# Altium PCB PCB1.PcbDoc
Units mm, origin at the board's own origin, x right, y up, seen from the top; angles counter-clockwise.
Board outline 50 x 50.13 mm, 2 copper layers (Top Layer, Bottom Layer); 11 components, 9 nets, 27 pads, 0 vias.
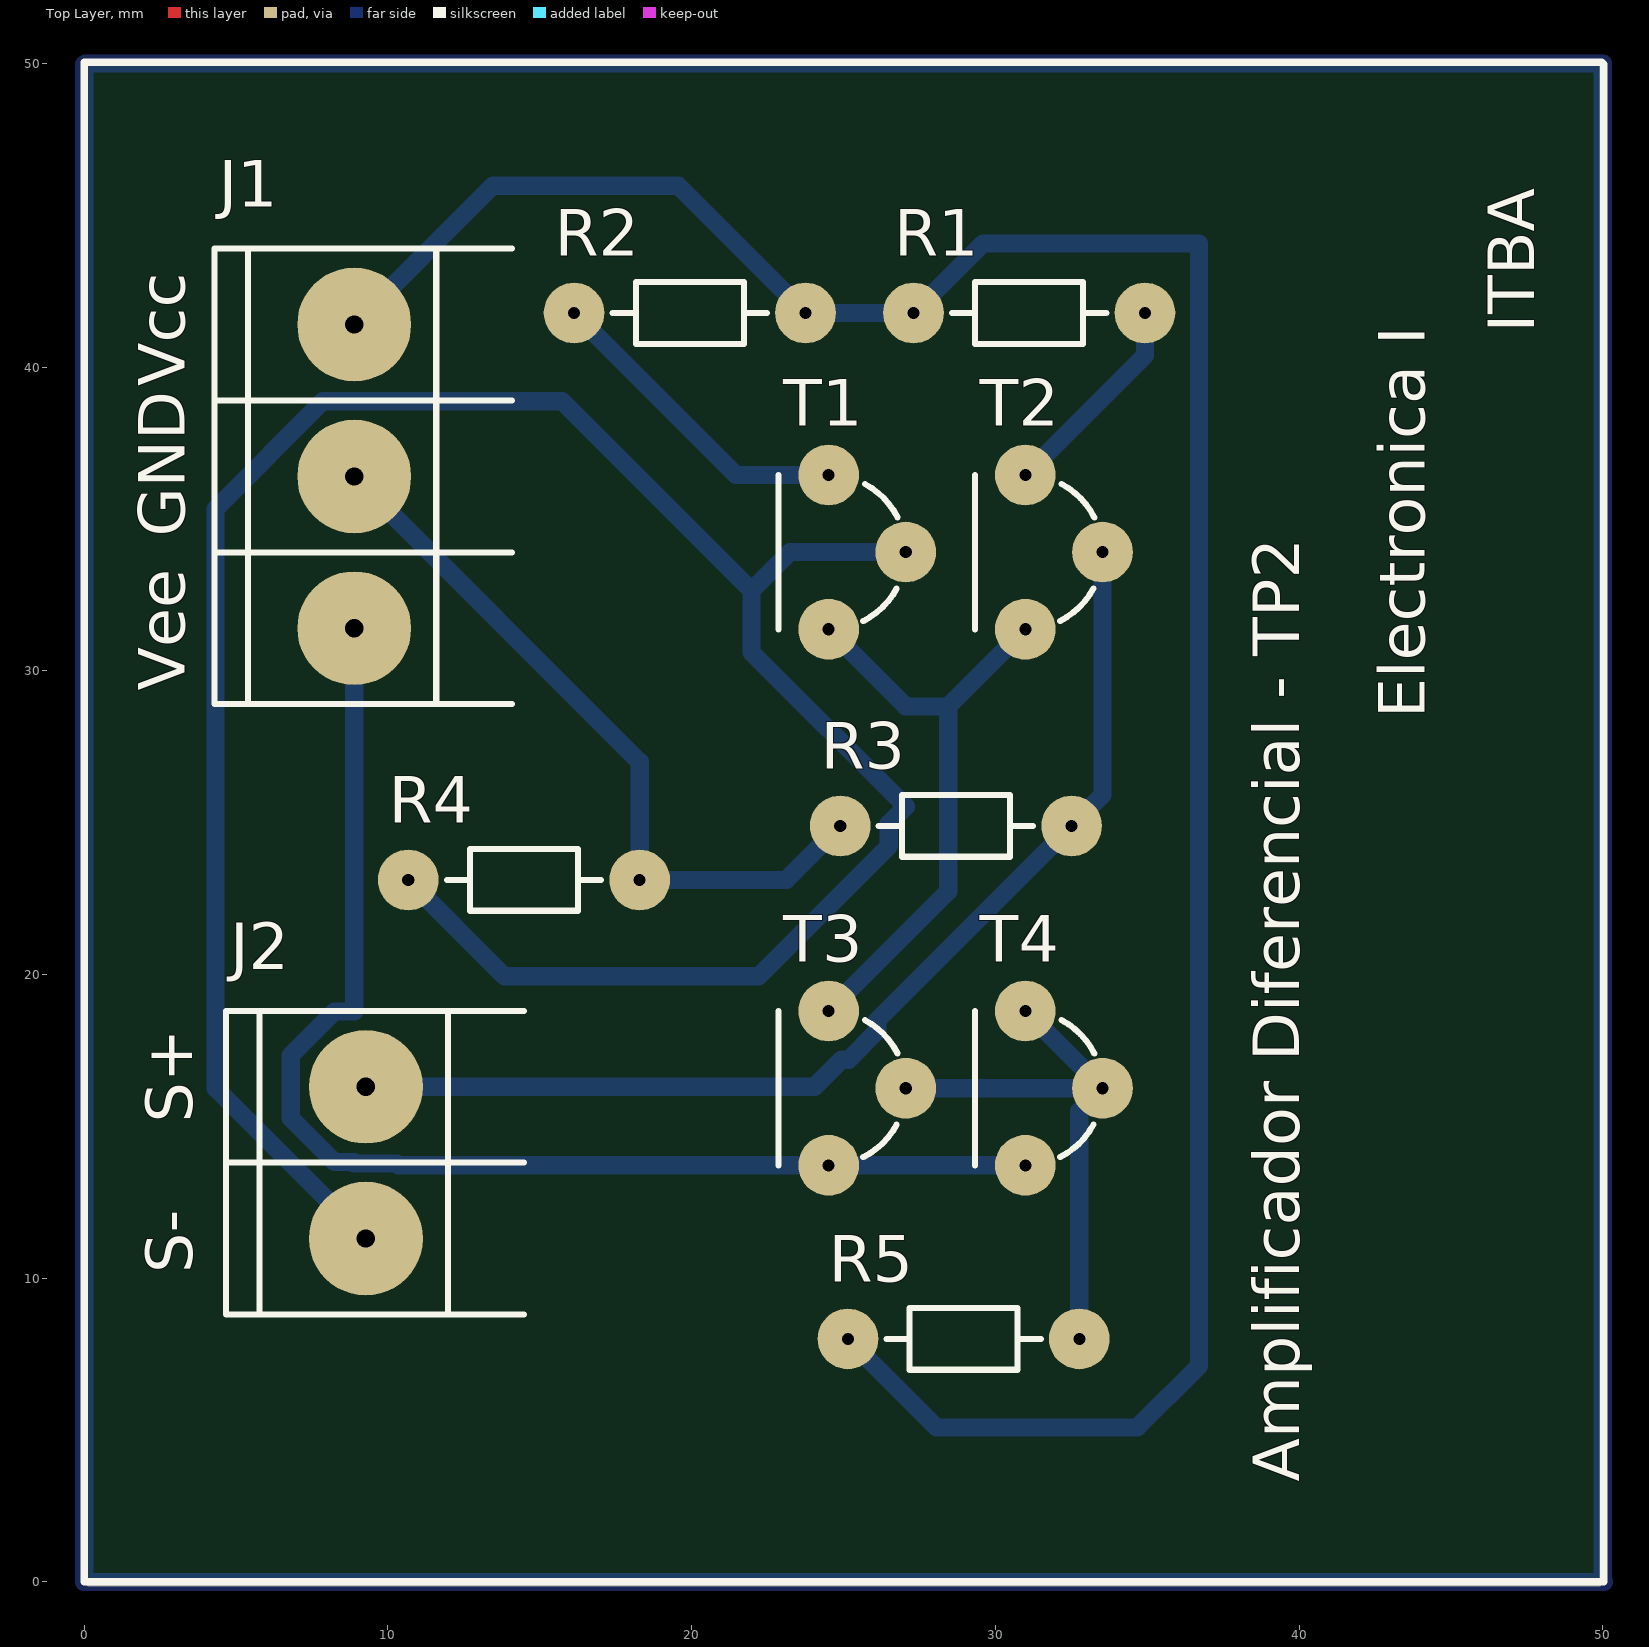
[diagram p0: Top Layer view]
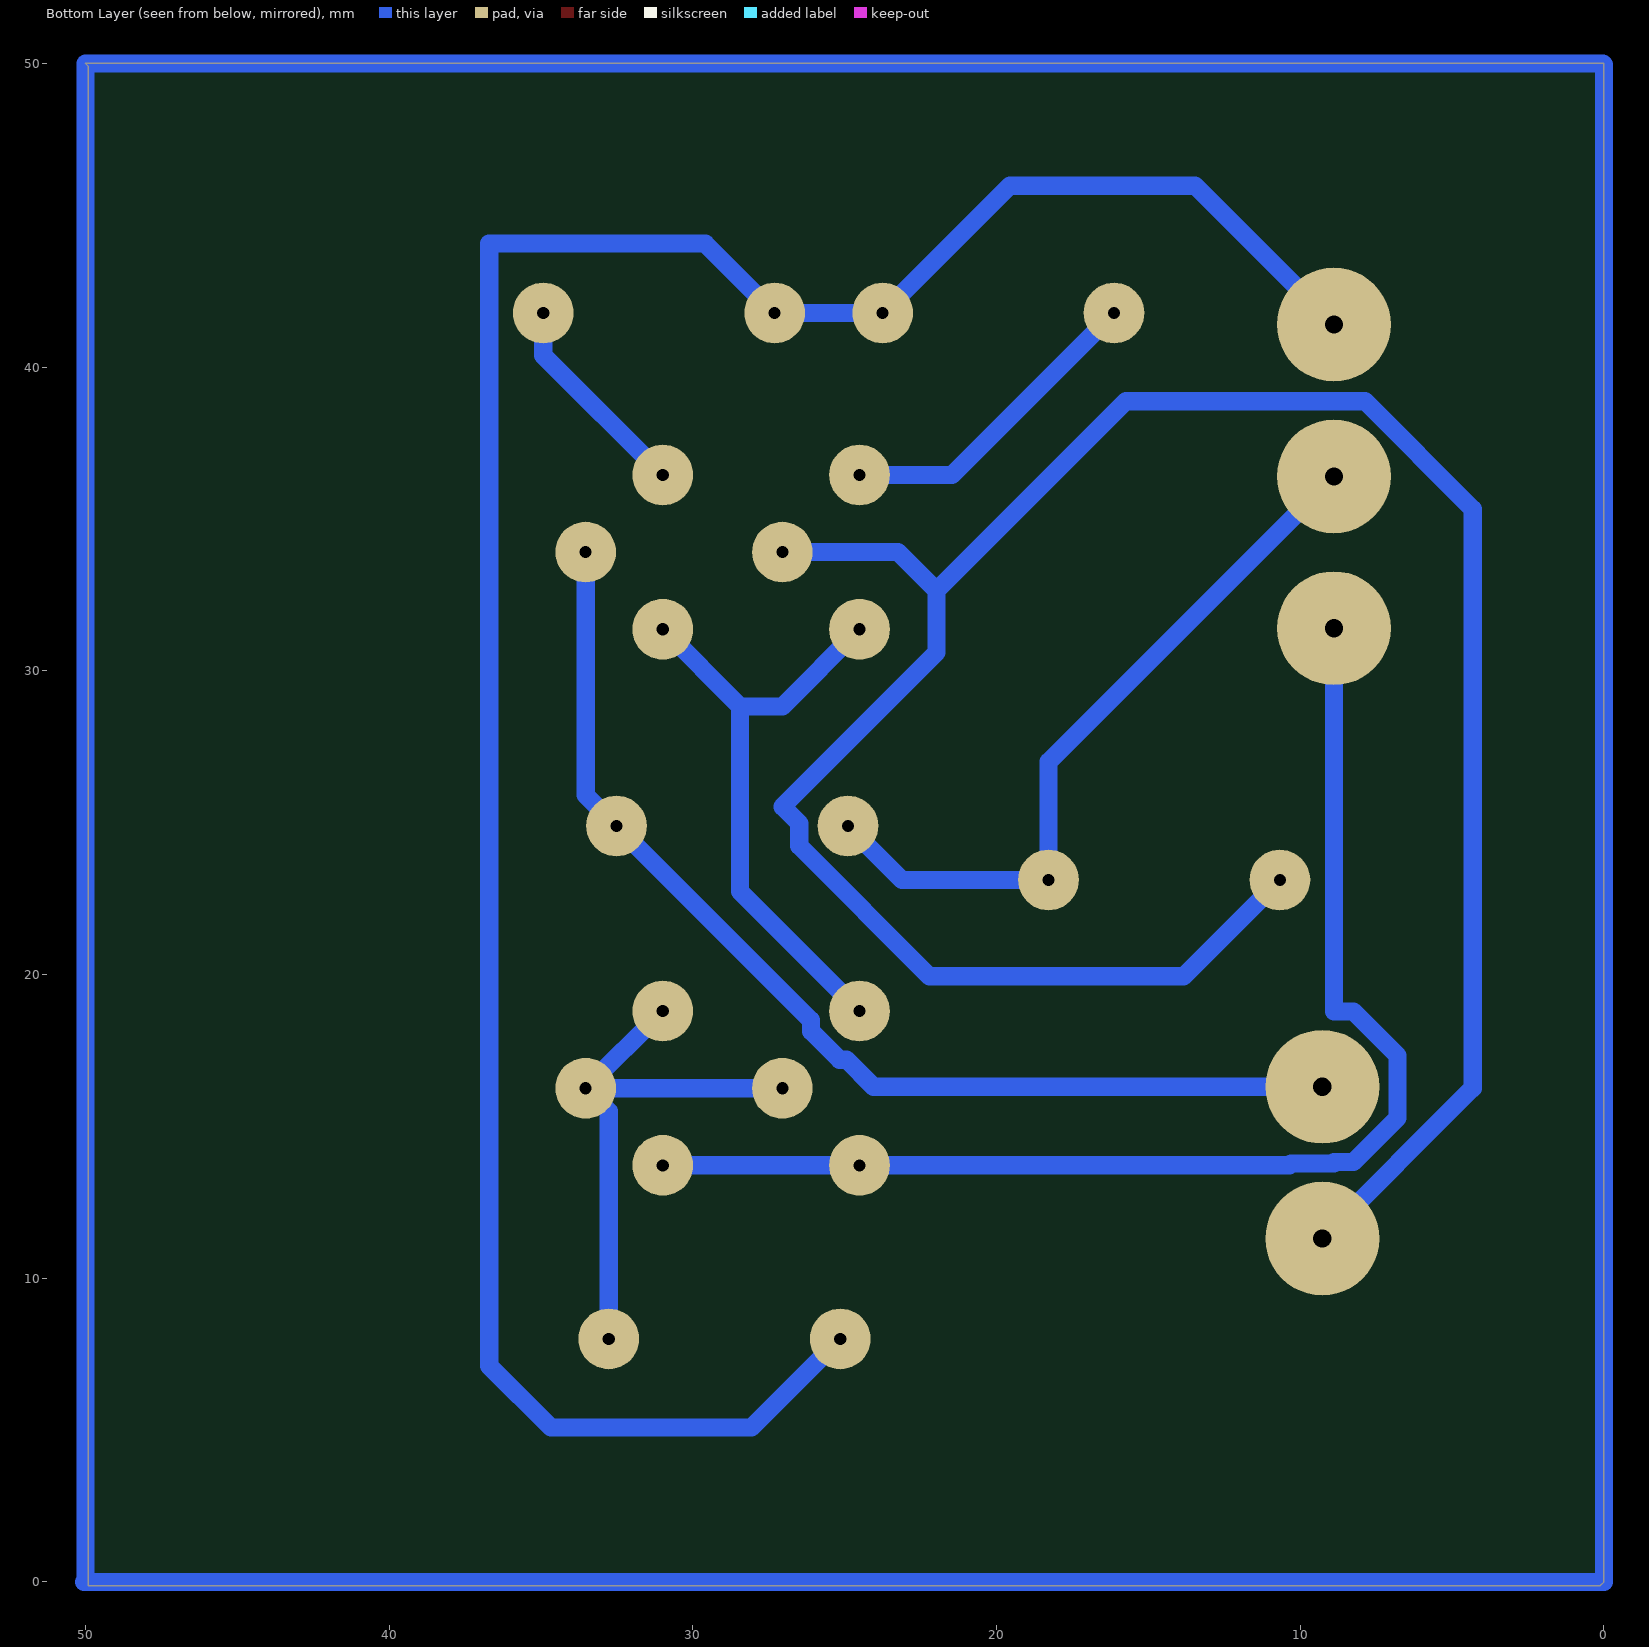
[diagram p1: Bottom Layer view, seen from below]
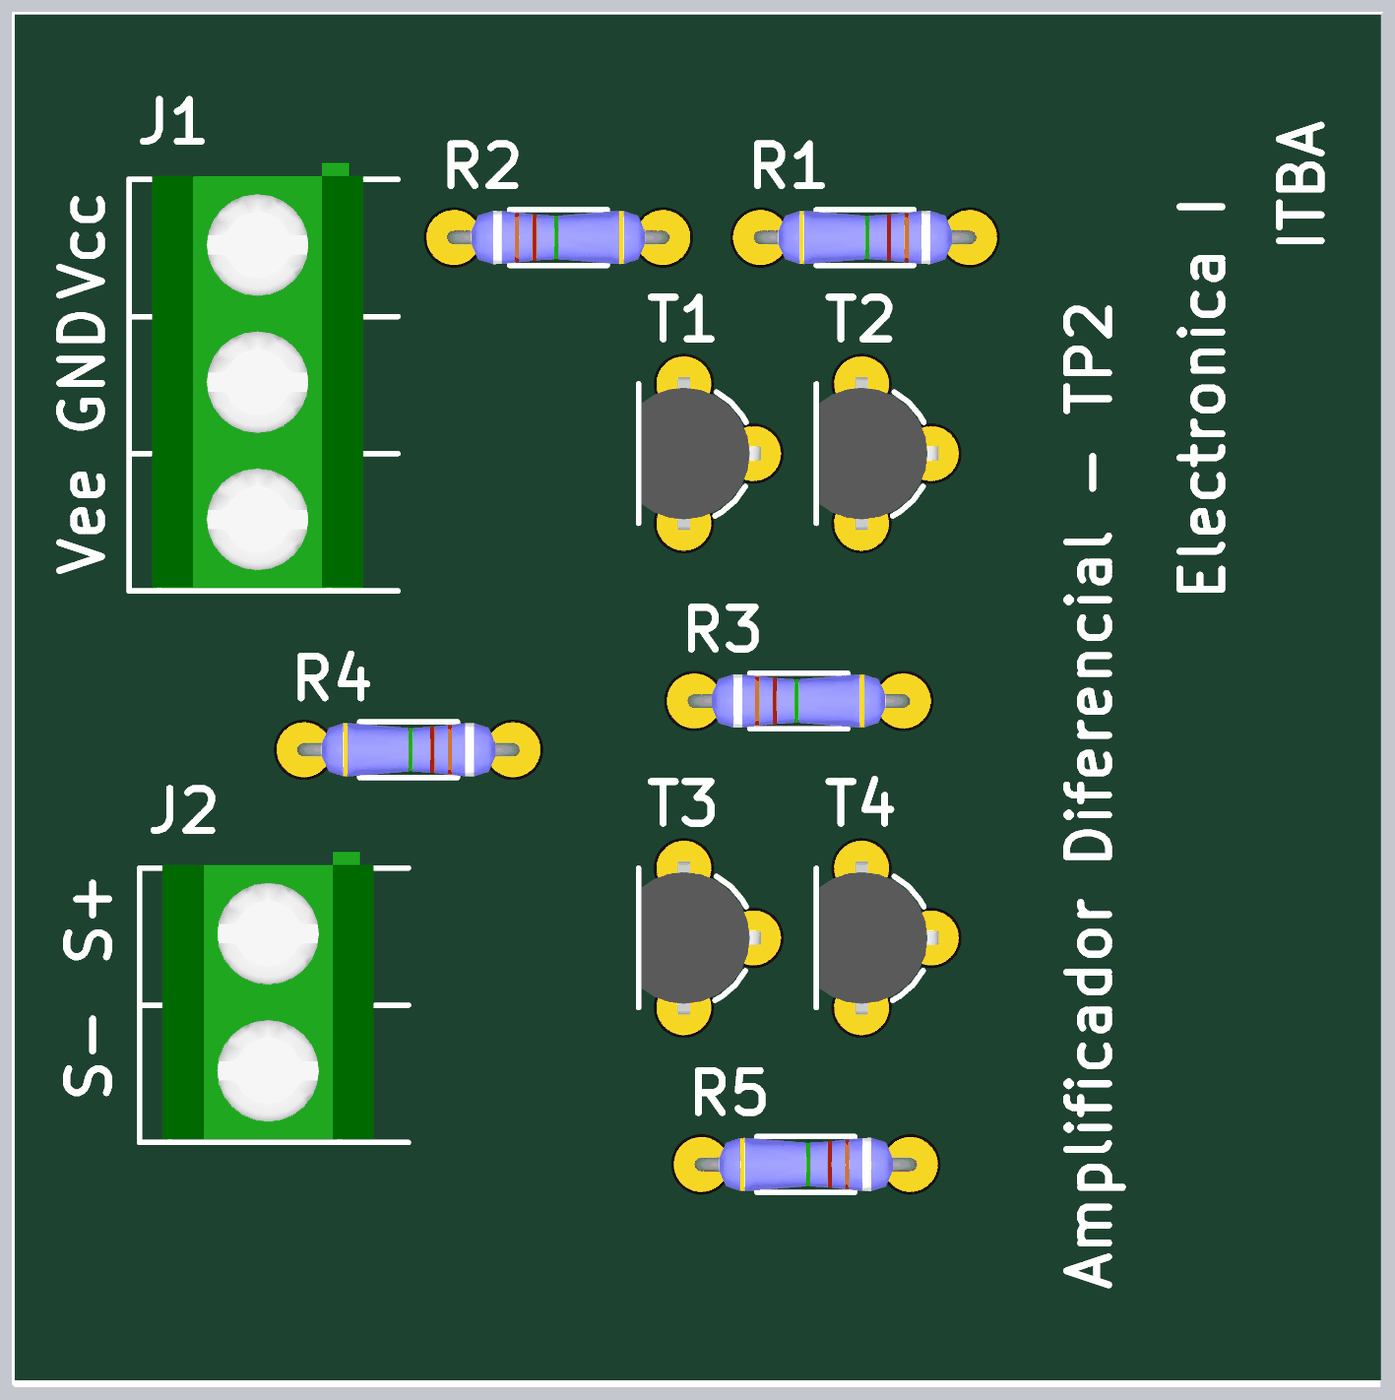
[diagram p2: 3D render of the assembled board from above, using the file's embedded part models]

## Layer stack, top to bottom
Top Solder: solder mask 0.0102, Solder Resist, Dk 3.5
Top Layer: signal copper 0.0356
Dielectric 1: dielectric 0.32, FR-4, Dk 4.8
Bottom Layer: signal copper 0.0356
Bottom Solder: solder mask 0.0102, Solder Resist, Dk 3.5

## Board outline
0,0 0,50 50,50 49.911,49.911 49.911,-0.127 0.127,-0.127

## Design rules (kind name [scope] priority, off if disabled: settings)
Clearance [All] p1: gap=0.3 ignorepadtopadclearanceinfootprint=FALSE
PolygonConnect [All] p1: connectstyle=Relief reliefconductorwidth=0.254 reliefentries=4 polygonreliefangle="90 Angle" airgapwidth=0.254
RoutingVias [All] p1: holewidth=0.711 width=1.27 viastyle="Through Hole" minholewidth=0.711 minwidth=1.27 maxholewidth=0.711 maxwidth=1.27
SolderMaskExpansion [All] p1: expansion=0.102
Width [All] p1: maxlimit=0.6 minlimit=0.6 preferedwidth=0.6
30 further rules are at their usual default settings.

## Components (designator, comment, footprint, x,y, rotation, side; value= is the part's Value field where it differs from the comment)
J1 "BORNERA 3" BORNERA3 8.89,36.402 r0 top
J2 "BORNERA 2" BORNERA2 9.271,13.803 r0 top
R1 "680" RES300 34.925,41.783 r180 top
R2 "680" RES300 16.129,41.783 r0 top
R3 "10k" RES300 24.892,24.892 r0 top
R4 "10k" RES300 18.288,23.114 r180 top
R5 "10k" RES300 32.766,8.001 r180 top
T1 "2N2222" TO92 25.781,33.909 r90 top
T2 "2N2222" TO92 32.258,33.909 r90 top
T3 "2N2222" TO92 25.781,16.256 r90 top
T4 "2N2222" TO92 32.258,16.256 r90 top

## Footprints (in the part's own frame and the unit in brackets; to place one, negate y for a bottom-side part, rotate by r counter-clockwise, add the part's x,y. Pads: shape width x height; smd on the part's side, far side on the other; paste and mask are expansions set on the pad)
BORNERA2 [mm] "Bornera con Tornillos 5mm separación"
  round 3.75 hole 0.6: 1(0,2.5) 2(0,-2.5)
  silkscreen extent -4.6,-5 5.2,5, body extent -3.76,-4.89 3.94,5.61, height 10
BORNERA3 [mm] "Bornera con Tornillos 5mm separación"
  round 3.75 hole 0.6: 1(0,5) 2(0,0) 3(0,-5)
  silkscreen extent -4.6,-7.5 5.2,7.5, body extent -3.76,-7.39 3.94,8.11, height 10.05
RES300 [mm]
  round 2 hole 0.4: 1(0,0) 2(7.62,0)
  silkscreen extent 1.27,-1.02 6.35,1.02, body extent -0.25,-0.97 7.87,0.97, height 2.01
TO92 [mm]
  round 2 hole 0.4: 1(0,-1.27) 2(2.54,1.27) 3(-2.54,1.27)
  silkscreen extent -2.54,-1 2.54,2.92, body extent -2.79,-1.55 2.79,2.79, height 8

## Part data
R1 R2 R3 R4 R5: library part RES
T1 T2 T3 T4: library part "TRANSISTOR NPN"

## Nets (pads, with @x,y where several pads share a name; then routed paths per layer and width w, separated by ;. In a path a pad name is that pad's centre, name@x,y a point inside that pad or via, vN(x,y) a via of type N, cw(c..) or ccw(c..) an arc to the next point about the centre after c; other vN are vias at no path point)
+SIG: J2.1 R3.2 T2.1 | length 36.4
  Bottom Layer w0.6: J2.1 24.05,16.303 24.943,17.196 25.174,17.196 26.111,18.133 26.111,18.491 R3.2 33.528,25.908 T2.1
-SIG: J2.2 R4.2 T1.1 | length 83.1
  Bottom Layer w0.6: J2.2 4.318,16.256 4.318,35.33 7.865,38.877 15.733,38.877 21.971,32.639 ; R4.2 13.843,19.939 22.202,19.939 26.492,24.229 26.492,24.968 27.051,25.527 21.971,30.607 21.971,32.639 ; T1.1 23.241,33.909 21.971,32.639
GND: J1.2 R3.1 R4.1 | length 24.5
  Bottom Layer w0.6: J1.2 18.288,27.004 R4.1 23.114,23.114 R3.1
NetR1_1: R1.1 T2.2 | length 7
  Bottom Layer w0.6: T2.2 34.925,40.386 R1.1
NetR2_1: R2.1 T1.2 | length 10.6
  Bottom Layer w0.6: R2.1 21.463,36.449 T1.2
NetR5_1: R5.1 T3.1 T4.1 T4.2 | length 18.6
  Bottom Layer w0.6: T3.1 T4.1 ; T4.2 T4.1 ; R5.1 32.766,15.494 T4.1
NetT1_3: T1.3 T2.3 T3.2 | length 20.2
  Bottom Layer w0.6: T3.2 28.448,22.733 28.448,28.829 ; T1.3 27.051,28.829 28.448,28.829 ; T2.3 28.448,28.829
VCC: J1.1 R1.2 R2.2 R5.2 | length 83
  Bottom Layer w0.6: J1.1 13.462,45.974 19.558,45.974 R2.2 R1.2 29.591,44.069 36.703,44.069 36.703,7.112 34.671,5.08 28.067,5.08 R5.2
VEE: J1.3 T3.3 T4.3 | length 42.2
  Bottom Layer w0.6: J1.3 8.89,18.778 8.246,18.778 6.796,17.328 6.796,15.278 8.246,13.828 8.89,13.828 8.89,13.778 10.296,13.778 10.358,13.716 T3.3 T4.3
copper on no net: | length 200
  Bottom Layer w0.6: 0,0 0,49.962 0.038,50 50,50 50,0.038 50.038,0 0,0

## Silkscreen, mask and mechanical layers (free items; w line width, h text height)
Top Overlay:
  lines w0.254: 0,0 0,50.038 49.962,50.038 50.038,49.962 50.038,0 0,0
  text "ITBA" at 47.752,41.136 h1.52 r90
  text "Vcc" at 3.302,39.37 h1.52 r90
  text "GND" at 3.302,34.417 h1.52 r90
  text "Vee" at 3.302,29.337 h1.52 r90
  text "Electronica I" at 44.132,28.44 h1.52 r90
  text "S+" at 3.556,15.113 h1.52 r90
  text "S-" at 3.556,10.16 h1.52 r90
  text "Amplificador Diferencial - TP2" at 40.005,3.302 h1.52 r90